# Altium PCB DUAL_RPS.PcbDoc
Units mm, origin at the board's own origin, x right, y up, seen from the top; angles counter-clockwise.
Board outline 116.84 x 48.26 mm, 2 copper layers (Top Layer, Bottom Layer); 16 components, 7 nets, 40 pads, 0 vias.
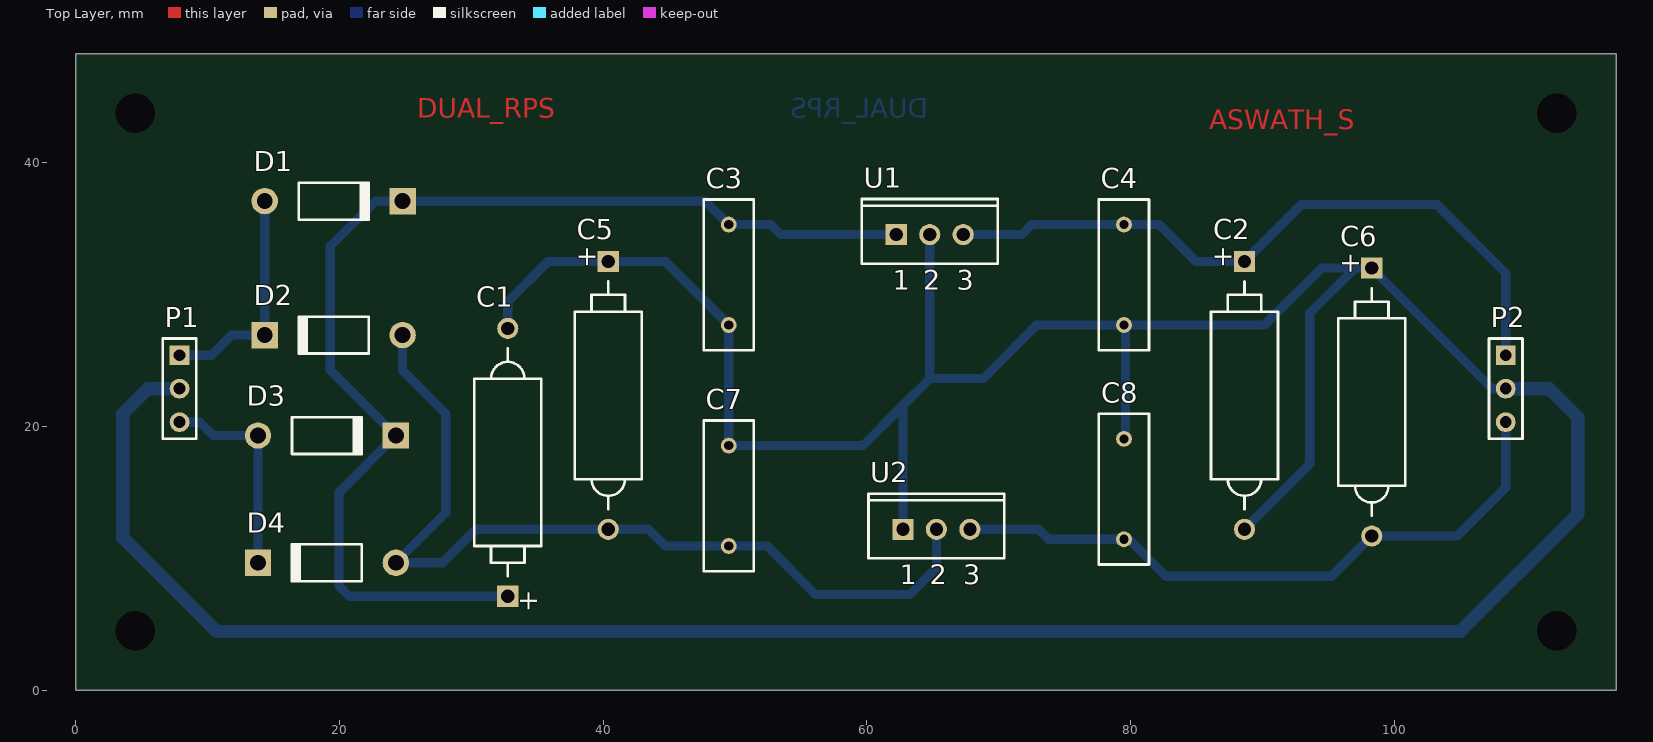
[diagram p0: Top Layer view]
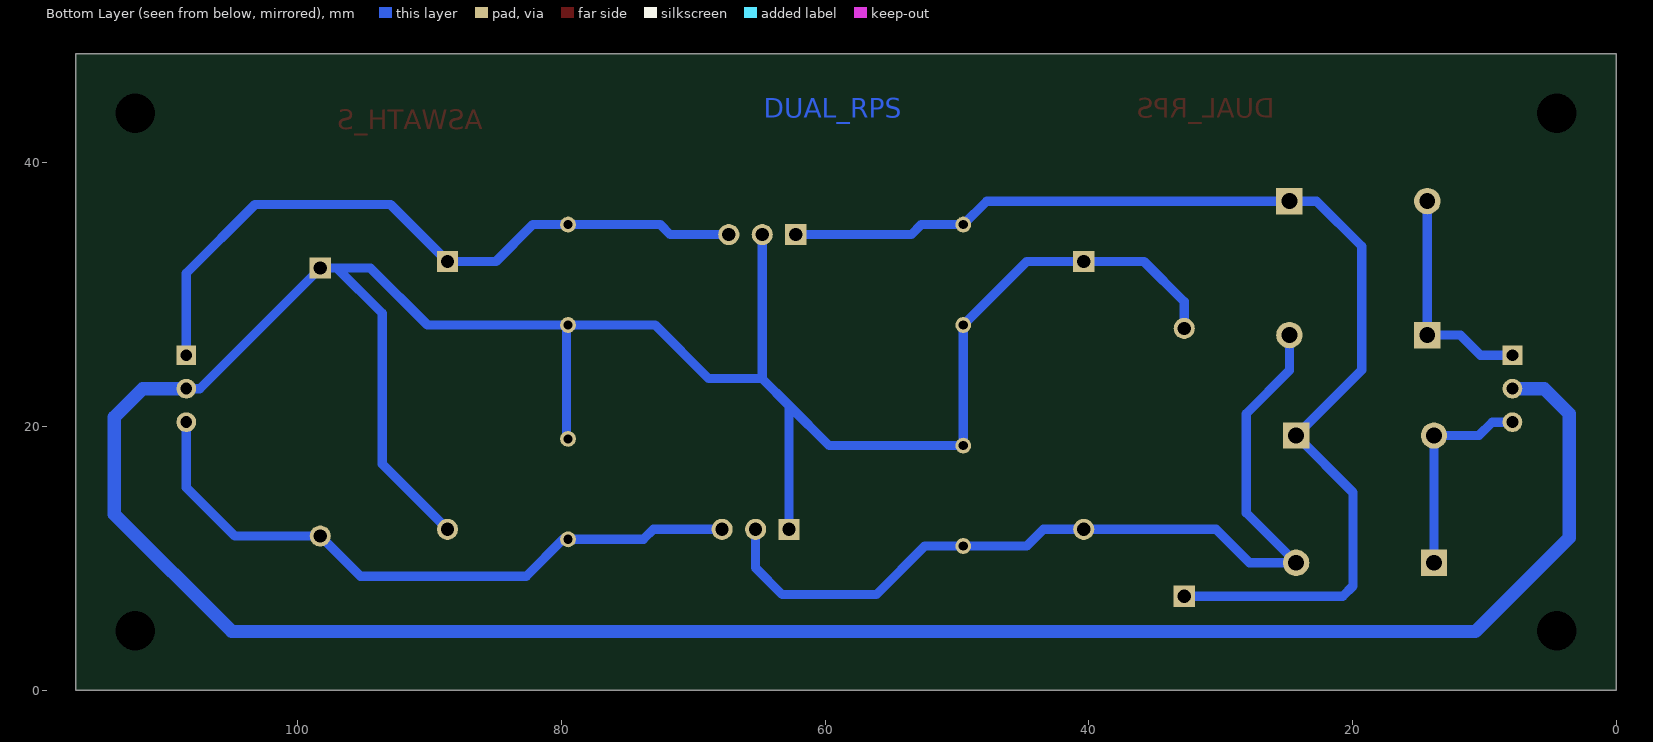
[diagram p1: Bottom Layer view, seen from below]

## Layer stack, top to bottom
Top Layer: signal copper 0.0356
Dielectric: dielectric 0.32, FR-4, Dk 4.8
Bottom Layer: signal copper 0.0356

## Board outline
0,0 116.84,0 116.84,48.26 0,48.26

## Design rules (kind name [scope] priority, off if disabled: settings)
Clearance [All] p1: gap=0.4
PolygonConnect [All] p1: connectstyle=Relief reliefconductorwidth=0.254 reliefentries=4 polygonreliefangle="90 Angle"
RoutingVias [All] p1: holewidth=0.711 width=1.27 viastyle="Through Hole" minholewidth=0.711 minwidth=1.27 maxholewidth=0.711 maxwidth=1.27
SilkscreenOverComponentPads [All] p1: minsilkscreentomaskgap=0.254
SolderMaskExpansion [All] p1: expansion=0.102
Width [All] p1: maxlimit=1.2 minlimit=0.4 preferedwidth=0.7
27 further rules are at their usual default settings.

## Components (designator, comment, footprint, x,y, rotation, side; value= is the part's Value field where it differs from the comment)
C1 "50 Vdc" POLAR0.8 32.766,17.272 r270 top
C2 "50 Vdc" POLAR0.8 88.646,22.352 r90 top
C3 "Capacitor Disc" RAD-0.3 49.53,31.496 r90 top
C4 "Capacitor Disc" RAD-0.3 79.502,31.496 r90 top
C5 "50 Vdc" POLAR0.8 40.386,22.352 r90 top
C6 "50 Vdc" POLAR0.8 98.298,21.844 r90 top
C7 "Capacitor Disc" RAD-0.3 49.53,14.732 r90 top
C8 "Capacitor Disc" RAD-0.3 79.502,15.24 r90 top
D1 "Diode 1N4007" DIO10.46-5.3x2.8 19.558,37.084 r0 top
D2 "Diode 1N4007" DIO10.46-5.3x2.8 19.558,26.924 r180 top
D3 "Diode 1N4007" DIO10.46-5.3x2.8 19.05,19.304 r0 top
D4 "Diode 1N4007" DIO10.46-5.3x2.8 19.05,9.652 r180 top
P1 "Header 3" HDR1X3 7.874,25.4 r270 top
P2 "Header 3" HDR1X3 108.458,25.4 r270 top
U1 "MC7812CT" 221A-04 64.77,34.544 r0 top
U2 "MC7912ACT" 221A-04 65.278,12.192 r0 top

## Footprints (in the part's own frame and the unit in brackets; to place one, negate y for a bottom-side part, rotate by r counter-clockwise, add the part's x,y. Pads: shape width x height; smd on the part's side, far side on the other; paste and mask are expansions set on the pad)
221A-04 [mm] "TO, Thru-Hole, Vertical, Heatsink Mounted; 3 In-Line Leads; Pitch 2.54 mm"
  rect 1.6x1.6 hole 1: 1(-2.54,0)
  round 1.6 hole 1: 2(0,0) 3(2.54,0)
  silkscreen extent -5.15,-2.2 5.15,2.7
DIO10.46-5.3x2.8 [mm] "Diode, Axial; Body 5.2 x 2.7 mm (LxDia. max), Lead Dia. 0.86 mm (max)"
  round 2 hole 1.2: 1(-5.23,0)
  rect 2x2 hole 1.2: 2(5.23,0)
  silkscreen extent -2.65,-1.4 2.75,1.4
HDR1X3 [mm] "Connector; Header; 3 Position"
  rect 1.5x1.5 hole 0.9: 1(0,0)
  round 1.5 hole 0.9: 2(2.54,0) 3(5.08,0)
  silkscreen extent -1.27,-1.27 6.35,1.27
POLAR0.8 [mm] "Polarized Capacitor (Axial); 2 Leads"
  rect 1.6x1.6 hole 1: 1(10.16,0)
  round 1.6 hole 1: 2(-10.16,0)
  silkscreen extent -8.64,-2.54 8.64,2.54
RAD-0.3 [mm] "Radial Cap, Thru-Hole; 2 Leads; 0.3 in Pin Spacing"
  round 1.2 hole 0.7: 1(-3.81,0) 2(3.81,0)
  silkscreen extent -5.71,-1.91 5.71,1.91

## Part data
C1 C2 C5 C6: library part "Cap Pol2", "Polarized Capacitor (Axial)"
C3 C4 C7 C8: library part Cap, "Capacitor"
D1 D2 D3 D4: "1 Amp General Purpose Rectifier"
P1 P2: "Header, 3-Pin"
U1: "3-Terminal Positive Fixed Voltage Regulator"
U2: "Three-Terminal Negative Fixed Voltage Regulator"

## Free pads (board coordinates)
  round 1.524 hole 3: 3(4.5,4.5) 3(4.5,43.76) 3(112.34,4.5) 3(112.34,43.76)

## Nets (pads, with @x,y where several pads share a name; then routed paths per layer and width w, separated by ;. In a path a pad name is that pad's centre, name@x,y a point inside that pad or via, vN(x,y) a via of type N, cw(c..) or ccw(c..) an arc to the next point about the centre after c; other vN are vias at no path point)
+12V: C2.1 C4.2 P2.1 U1.3 | length 52.8
  Bottom Layer w0.7: U1.3 71.755,34.544 72.517,35.306 C4.2 82.169,35.306 84.963,32.512 C2.1 92.964,36.83 103.251,36.83 108.458,31.623 P2.1
GND: C1.2 C2.2 C3.1 C4.1 C5.1 C6.1 C7.2 C8.2 P1.2 P2.2 U1.2 U2.1 | length 297
  Bottom Layer w0.7: C1.2 32.766,29.464 35.814,32.512 C5.1 44.704,32.512 C3.1 C7.2 59.69,18.542 62.738,21.59 ; U2.1 62.738,21.59 ; U1.2 64.77,23.622 ; C8.2 79.629,19.177 C4.1@79.629,27.686 ; C2.2 93.599,17.145 93.599,28.575 97.028,32.004 ; P2.2 107.442,22.86 C6.1 97.028,32.004 ; 62.738,21.59 64.77,23.622 ; 64.77,23.622 68.834,23.622 72.898,27.686 C4.1 C4.1@79.629,27.686 ; C4.1@79.629,27.686 90.17,27.686 94.488,32.004 97.028,32.004
  Bottom Layer w1: P1.2 5.461,22.86 3.556,20.955 3.556,11.557 10.668,4.445 105.029,4.445 113.919,13.335 113.919,20.701 111.76,22.86 P2.2
NetC1_1: C1.1 C3.2 D1.2 D3.2 U1.1 | length 88.1
  Bottom Layer w0.7: C1.1 20.747,7.112 19.962,7.897 19.962,14.986 D3.2 19.304,24.28 19.304,33.655 22.733,37.084 D1.2 47.752,37.084 C3.2 52.705,35.306 53.467,34.544 U1.1
NetC5_2: C5.2 C7.1 D2.1 D4.1 U2.2 | length 68.1
  Bottom Layer w0.7: D2.1 24.788,24.234 28.067,20.955 28.067,13.439 D4.1 27.813,9.652 30.353,12.192 C5.2 43.434,12.192 44.704,10.922 C7.1 52.451,10.922 56.134,7.239 63.246,7.239 65.278,9.271 U2.2
NetC6_2: C6.2 C8.1 P2.3 U2.3 | length 49.9
  Bottom Layer w0.7: U2.3 73.025,12.192 73.787,11.43 C8.1 79.883,11.43 82.677,8.636 95.25,8.636 C6.2 104.775,11.684 108.458,15.367 P2.3
NetD1_1: D1.1 D2.2 P1.1 | length 17.4
  Bottom Layer w0.7: P1.1 10.287,25.4 11.811,26.924 D2.2 D1.1
  Bottom Layer w1: P1.1@7.747,25.273 P1.1
NetD3_1: D3.1 D4.2 P1.3 | length 16
  Bottom Layer w0.7: P1.3 9.398,20.32 10.414,19.304 D3.1 D4.2

## Other copper
Top Layer:
  text "DUAL_RPS" at 25.908,42.926 h2.52
  text "ASWATH_S" at 85.979,42.037 h2.52
Bottom Layer:
  text "DUAL_RPS" at 64.643,42.926 h2.52

## Silkscreen, mask and mechanical layers (free items; w line width, h text height)
Mechanical 1:
  the board outline again, w0.254

## Text inside footprints (layer, text, board x,y; h text height)
C1: Top Overlay "+" at 33.716,7.62 h1.5 r270
C2: Top Overlay "+" at 87.696,32.004 h1.5 r90
C5: Top Overlay "+" at 39.436,32.004 h1.5 r90
C6: Top Overlay "+" at 97.348,31.496 h1.5 r90
U1: Top Overlay "1" at 61.98,30.369 h1.5; Top Overlay "2" at 64.27,30.369 h1.5; Top Overlay "3" at 66.81,30.369 h1.5
U2: Top Overlay "1" at 62.488,8.017 h1.5; Top Overlay "2" at 64.778,8.017 h1.5; Top Overlay "3" at 67.318,8.017 h1.5